# Altium PCB main_pcb_v0.PcbDoc (part 1 of 2)
Units mil, origin at the board's own origin, x right, y up, seen from the top; angles counter-clockwise.
Board outline 8090 x 4600 mil, 2 copper layers (Top Layer, Bottom Layer); 81 components, 148 nets, 565 pads, 37 vias.
Unrouted connection lines stored in the file: 2.
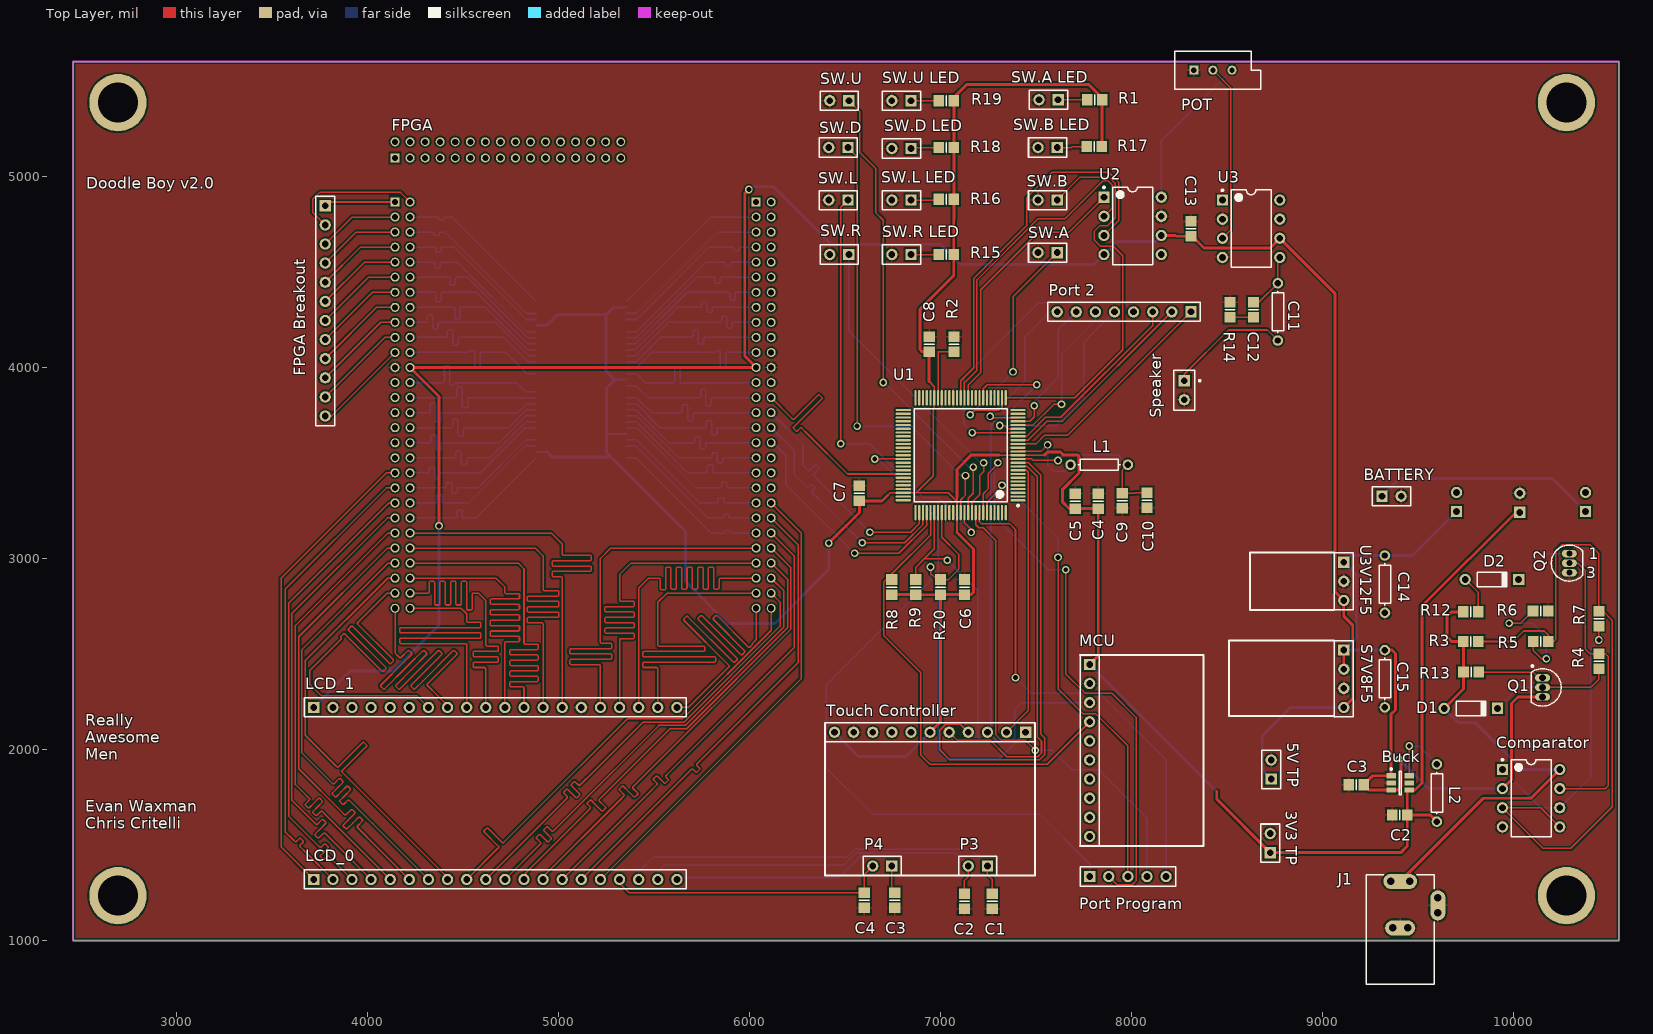
[diagram p0: Top Layer view]
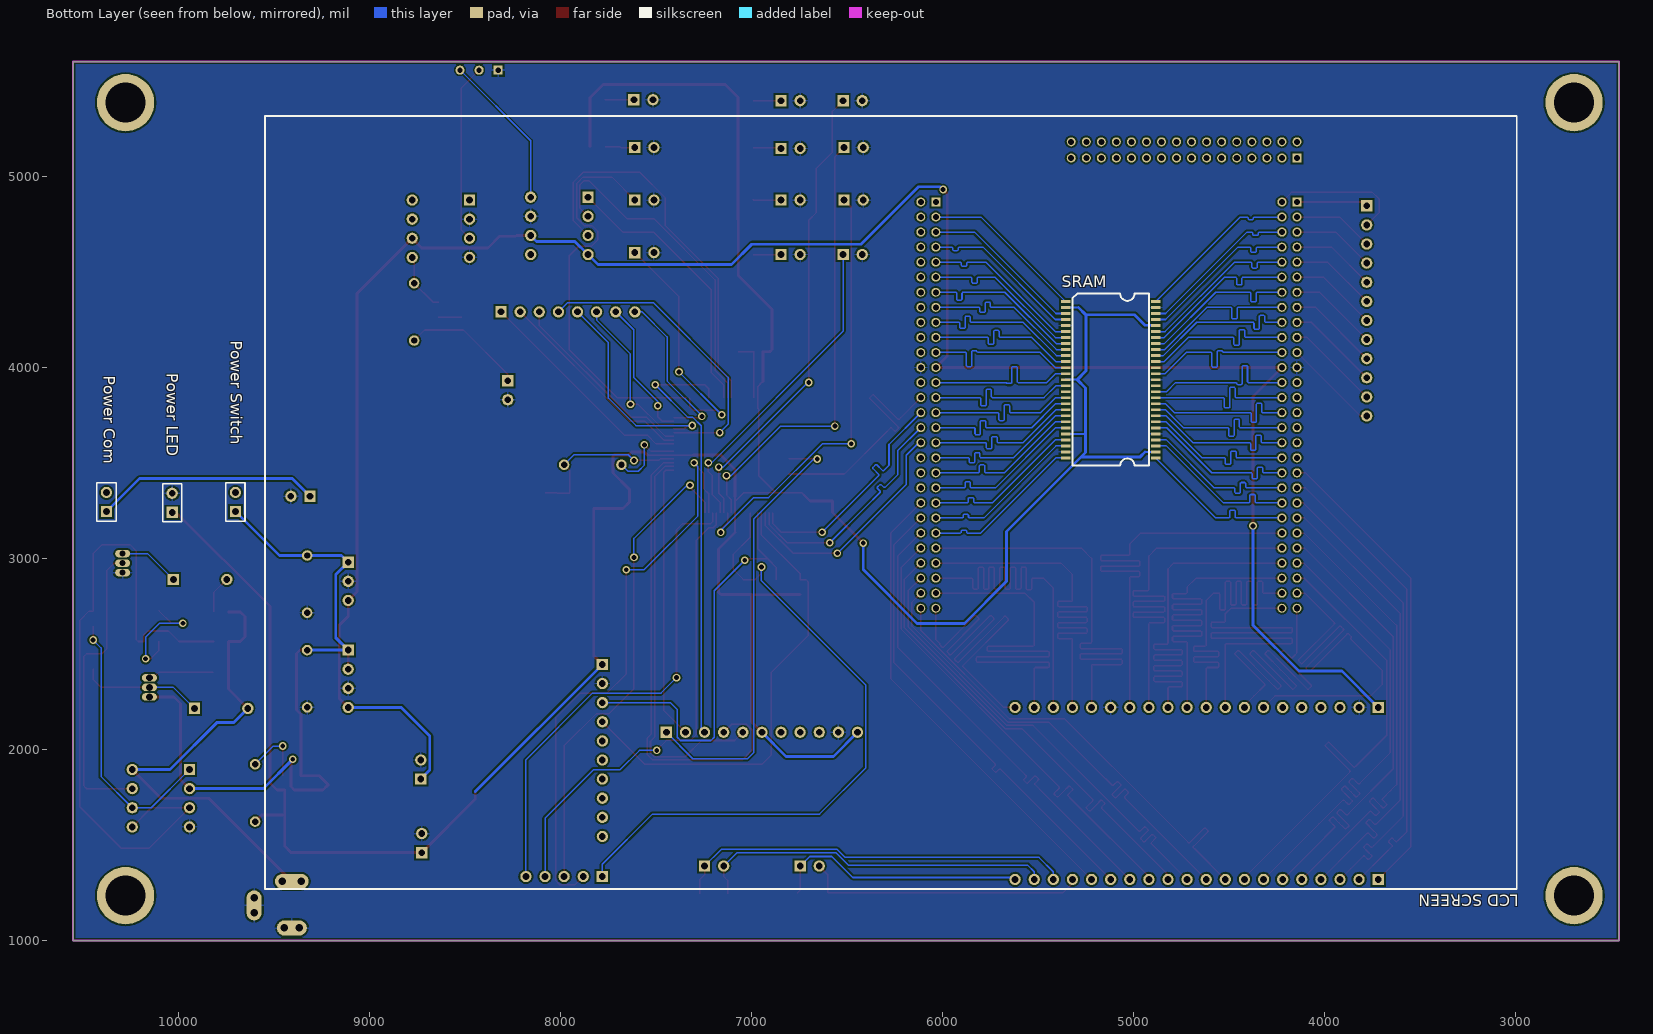
[diagram p1: Bottom Layer view, seen from below]

## Layer stack, top to bottom
Top Solder: solder mask 0.4, Solder Resist, Dk 3.5
Top Layer: signal copper 1.4
Dielectric 1: dielectric 12.6, FR-4, Dk 4.8
Bottom Layer: signal copper 1.4
Bottom Solder: solder mask 0.4, Solder Resist, Dk 3.5

## Board outline
2460,1000 10550,1000 10550,5600 2460,5600

## Design rules (kind name [scope] priority, off if disabled: settings)
Clearance [All] p1: gap=9 ignorepadtopadclearanceinfootprint=TRUE
HoleSize [All] p1: absolutevalues=TRUE maxlimit=240 minlimit=1 maxpercent=80.000 minpercent=20.000
MatchedLengths sram_match_length_2 [InNetClass('SRAM_net')] p1: tolerance=10 checknetsindiffpair=FALSE checkdiffpairvsdiffpair=TRUE checkxsignals=TRUE checkothers=TRUE
MatchedLengths lcd_match_length_1 [InNetClass('LCD_net')] p2: tolerance=10 checknetsindiffpair=FALSE checkdiffpairvsdiffpair=TRUE checkxsignals=TRUE checkothers=TRUE
MatchedLengths lcd_spi_match_length [InNetClass('FPGA_spi')] p3: tolerance=10 checknetsindiffpair=FALSE checkdiffpairvsdiffpair=TRUE checkxsignals=TRUE checkothers=TRUE
MinimumSolderMaskSliver [All] p1 off: minsoldermaskwidth=10
PolygonConnect [All] p1: connectstyle=Relief reliefconductorwidth=10 reliefentries=4 polygonreliefangle="90 Angle" airgapwidth=10
RoutingCorners [All] p1: cornerstyle=Round minsetback=1000 maxsetback=1000
RoutingVias [All] p1: holewidth=25 width=40 viastyle="Through Hole" minholewidth=25 minwidth=40 maxholewidth=25 maxwidth=40
SMDNeckDown [InNet('3V3')] p1: percent=80.000
SilkToSolderMaskClearance [IsPad] p1 off: minsilkscreentomaskgap=2.5 clearancetoexposedcopper=TRUE
SolderMaskExpansion [All] p1: expansion=4
Width 5V_width [InNet('5V')] p1: maxlimit=15 minlimit=7 preferedwidth=15
Width Power_common_width [InNet('Power_Common')] p2: maxlimit=15 minlimit=7 preferedwidth=15
Width 12V_width [InNet('12V')] p3: maxlimit=15 minlimit=7 preferedwidth=15
Width V_BAT_width [InNet('V_BAT')] p4: maxlimit=15 minlimit=7 preferedwidth=15
Width 3V3_width [InNet('3V3')] p5: maxlimit=15 minlimit=7 preferedwidth=15
Width [All] p6: maxlimit=15 minlimit=7 preferedwidth=8
26 further rules are at their usual default settings.

## Classes and differential pairs
net class FPGA_spi: FPGA_MISO FPGA_MOSI FPGA_SCLK FPGA_SS
net class LCD_net: BLUE0 BLUE1 BLUE2 BLUE3 BLUE4 BLUE5 BLUE6 BLUE7 CLK_pixel DE GREEN0 GREEN1 GREEN2 GREEN3 GREEN4 GREEN5 GREEN6 GREEN7 HSYNC ON/OFF RED0 RED1 RED2 RED3 RED4 RED5 RED6 RED7 VSYNC
net class SRAM_net: /BHE /BLE /CE /OE /WE A0 A1 A2 A3 A4 A5 A6 A7 A8 A9 A10 A11 A12 A13 A14 A15 A16 A17 A18 A19 IO0 IO1 IO2 IO3 IO4 IO5 IO6 IO7 IO8 IO9 IO10 IO11 IO12 IO13 IO14 IO15
net class auto_route_class: 3V3 5V 12V DAC_CS DAC_DIN DAC_SCK IMU_SCL IMU_SDA NetBuck_6 NetC9_2 NetC11_1 NetC11_2 NetC12_1 NetComparator_1 NetComparator_3 NetComparator_7 NetD1_2 NetD2_1 NetD2_2 "NetPort 2_1" "NetPort 2_2" "NetPort 2_3" "NetPort 2_4" "NetPort 2_5" "NetPort 2_6" "NetPort 2_7" "NetPort 2_8" NetPOT_2 NetPOT_3 NetQ1_1 NetR1_2 NetR2_1 NetR5_1 NetR15_2 NetR16_2 NetR17_2 NetR18_2 NetR19_2 Power_Common RST_NMI_N SWCLKTCK SWDIOTMS switch_A switch_B switch_DOWN switch_LEFT switch_RIGHT switch_UP TDI_ADC14CLK TDO_SWO TOUCH_INT TOUCH_SCL TOUCH_SDA/CS TOUCH_SDI TOUCH_SDO V_BAT VSW VSYNC XL XR YD YU
component class dac_audio_out: C11 C12 C13 POT R14 Speaker U2 U3
component class MSPBreakout: C4 C5 C6 C7 C8 C9 C10 L1 MCU "Port 2" "Port Program" R1 R2 R8 R9 R15 R16 R17 R18 R19 R20 SW.A "SW.A LED" SW.B "SW.B LED" SW.D "SW.D LED" SW.L "SW.L LED" SW.R "SW.R LED" SW.U "SW.U LED" U1
component class BatteryRecharge2: "3V3 TP" "5V TP" BATTERY Buck C2 C3 C14 C15 Comparator D1 D2 J1 L2 "Power Com" "Power LED" "Power Switch" Q1 Q2 R3 R4 R5 R6 R7 R12 R13 S7V8F5 U3V12F5
component class lcd_breakout: C1 C2 C3 C4 LCD_0 LCD_1 P3 P4 "Touch Controller"
component class fpga_sram: FPGA "FPGA Breakout" SRAM

## Components (designator, comment, footprint, x,y, rotation, side; value= is the part's Value field where it differs from the comment)
"3V3 TP" "Header 2" HDR1X2 8725,1460 r90 top
"5V TP" "Header 2" HDR1X2 8730,1845 r90 top
BATTERY "Header 2" HDR1X2 9310,3325 r0 top (schematic designator Battery)
Buck "Header 3X2A" SOT23-6_M 9405,1825 r0 top
C1 "Cap" 6-0805_M 7270,1205.63 r90 top value=10nF
C2 "Cap" 6-0805_M 9402.87,1657.4 r0 top value=10uF
C2 "Cap" 6-0805_M 7125,1205.63 r90 top value=10nF
C3 "Cap" 6-0805_M 9175,1815 r0 top value=4.7uF
C3 "Cap" 6-0805_M 6760,1210 r90 top value=10nF
C4 "Cap" 6-0805_M 7825,3300 r270 top value=100nF
C4 "Cap" 6-0805_M 6600,1210.63 r90 top value=10nF
C5 "Cap" 6-0805_M 7705,3300 r270 top value=100nF
C6 "Cap Pol1" 6-0805_M 7125,2850 r90 top value=10uF
C7 "Cap" 6-0805_M 6575,3340 r270 top value=100nF
C8 "Cap" 6-0805_M 6940,4120.79 r270 top value=100nF
C9 "Cap" 6-0805_M 7950,3300.63 r90 top value=100nF
C10 "Cap" 6-0805_M 8080,3304.37 r90 top value=4uF
C11 "Cap Pol1" AXIAL-0.3 8765,4290 r270 top value=270uF
C12 "Cap" 6-0805_M 8637.44,4300.63 r90 top value=0.047uF
C13 "Cap" 6-0805_M 8310,4725 r90 top value=0.1uF
C14 "Cap Pol2" AXIAL-0.3 9325,2865 r270 top value=50uF
C15 "Cap Pol2" AXIAL-0.3 9325,2370 r270 top value=50uF
Comparator "LT1017CN8" LT-N8 10090,1745 r0 top
D1 "Diode 1N914" DO-35 9775,2215 r0 top
D2 "Diode 1N914" DO-35 9885,2890 r0 top
FPGA "CoreEP3C16" CoreEP3C16 4145.24,4864.96 r0 top
"FPGA Breakout" "Header 12" HDR1X12 3780,4845 r270 top
J1 "PWR2.5" KLD-0202 9405,770.63 r90 top
L1 "Inductor" AXIAL-0.3 7830,3490 r0 top value=4.7uH
L2 "Inductor" AXIAL-0.3 9597.24,1772.4 r270 top value=10uH
LCD_0 "Header 20" HDR1X20 3720,1320 r0 top
LCD_1 "Header 20" HDR1X20 3720,2220 r0 top
MCU "Header 10" HDR1X10 7780,2445 r270 top
P3 "Header 2" HDR1X2 7245,1390 r180 top
P4 "Header 2" HDR1X2 6745,1390 r180 top
"Port 2" "Header 8" HDR1X8 8310,4290 r180 top
"Port Program" "Header 5" HDR1X5 7780,1335 r0 top
POT "RPot_3" VR5 8425,5555 r0 top value=10K
"Power Com" "Header 2" HDR1X2 10375,3245 r90 bottom
"Power LED" "Header 2" HDR1X2 10031.06,3240.63 r90 bottom
"Power Switch" "Header 2" HDR1X2 9700,3245 r90 bottom
Q1 "2N3906" TO-92A 10150,2325 r180 top
Q2 "2N7000" SOT54 10290,2975 r0 top
R1 "Res1" 6-0805_M 7805.63,5400 r180 top value=1K
R2 "Res1" 6-0805_M 7070,4120.16 r90 top value=91K
R3 "Res1" 6-0805_M 9775,2565 r180 top value=5.6K
R4 "Res1" 6-0805_M 10445,2460.63 r270 top value=510
R5 "Res1" 6-0805_M 10140,2565 r0 top value=1.5K
R6 "Res1" 6-0805_M 10139.37,2725 r180 top value=1K
R7 "Res1" 6-0805_M 10445,2685 r270 top value=100K
R8 "Res1" 6-0805_M 6745,2850 r270 top value=10K
R9 "Res1" 6-0805_M 6870,2850 r270 top value=10K
R12 "Res1" 6-0805_M 9775,2720 r0 top value=1K
R13 "Res1" 6-0805_M 9775.63,2405 r180 top value=39
R14 "Res1" 6-0805_M 8515,4300 r270 top value=10
R15 "Res1" 6-0805_M 7029.37,4590 r180 top value=1K
R16 "Res1" 6-0805_M 7030,4878.82 r180 top value=1K
R17 "Res1" 6-0805_M 7804.37,5155 r180 top value=1K
R18 "Res1" 6-0805_M 7030.63,5150 r180 top value=1K
R19 "Res1" 6-0805_M 7030.63,5395 r180 top value=1K
R20 "Res1" 6-0805_M 7000,2850 r270 top value=47K
S7V8F5 "Header 4" HDR1X4 9110,2520 r270 top
Speaker "Speaker" PIN2 8275,3930 r270 top
SRAM "CY7C10612G30" TSOP54 5120,3935 r270 bottom
SW.A "Header 2" HDR1X2 7610,4600 r180 top
"SW.A LED" "Header 2" HDR1X2 7615,5400 r180 top
SW.B "Header 2" HDR1X2 7610,4875 r180 top
"SW.B LED" "Header 2" HDR1X2 7610,5150 r180 top
SW.D "Header 2" HDR1X2 6515,5150 r180 top
"SW.D LED" "Header 2" HDR1X2 6845,5145 r180 top
SW.L "Header 2" HDR1X2 6515,4875 r180 top
"SW.L LED" "Header 2" HDR1X2 6845,4875 r180 top
SW.R "Header 2" HDR1X2 6520,4590 r180 top
"SW.R LED" "Header 2" HDR1X2 6845,4590 r180 top
SW.U "Header 2" HDR1X2 6520,5395 r180 top
"SW.U LED" "Header 2" HDR1X2 6845,5395 r180 top
"Touch Controller" "Header 11" HDR1X11 7445,2090 r180 top
U1 "XMS432P401RIPZR" PZ0100A_M 7105,3540 r180 top value=Value
U2 "LT1661" DIP-8 8005,4740 r0 top
U3 "LM386N-1" DIP-8 8625,4725 r0 top
U3V12F5 "Header 3" HDR1X3 9110,2980 r270 top

## Footprints (in the part's own frame and the unit in brackets; to place one, negate y for a bottom-side part, rotate by r counter-clockwise, add the part's x,y. Pads: shape width x height; smd on the part's side, far side on the other; paste and mask are expansions set on the pad)
6-0805_M [mm] "Chip Resistor, Body 2.0x1.2mm, IPC Low Density"
  rect 1.4x1.5 smd: 1(-1,0) 2(1,0)
  silkscreen extent 0,-0.65 0,0.65, body extent -1.07,-0.7 1.07,0.7, height 0.7
AXIAL-0.3 [mm] "Axial Device, Thru-Hole; 2 Leads; 0.3 in Pin Spacing"
  round 1.4 hole 0.85: 1(-3.81,0) 2(3.81,0)
  silkscreen extent -2.77,-0.76 2.77,0.76
CoreEP3C16 [mm]
  rect 1.2x1.2 hole 0.8: 1(0,0) 57(0,5.842) 89(48,0)
  round 1.2 hole 0.8: 2(2,0) 3(0,-2) 4(2,-2) 5(0,-4) 6(2,-4) 7(0,-6) 8(2,-6) 9(0,-8) 10(2,-8) 11(0,-10) 12(2,-10) 13(0,-12) 14(2,-12) 15(0,-14) 16(2,-14) 17(0,-16) 18(2,-16) 19(0,-18) 20(2,-18) 21(0,-20) 22(2,-20) 23(0,-22) 24(2,-22) 25(0,-24) 26(2,-24) 27(0,-26) 28(2,-26) 29(0,-28) 30(2,-28) 31(0,-30) 32(2,-30) 33(0,-32) 34(2,-32) 35(0,-34) 36(2,-34) 37(0,-36) 38(2,-36) 39(0,-38) 40(2,-38) 41(0,-40) 42(2,-40) 43(0,-42) 44(2,-42) 45(0,-44) 46(2,-44) 47(0,-46) 48(2,-46) 49(0,-48) 50(2,-48) 51(0,-50) 52(2,-50) 53(0,-52) 54(2,-52) 55(0,-54) 56(2,-54) 58(0,8) 59(2,5.842) 60(2,8) 61(4,5.842) 62(4,8) 63(6,5.842) 64(6,8) 65(8,5.842) 66(8,8) 67(10,5.842) 68(10,8) 69(12,5.842) 70(12,8) 71(14,5.842) 72(14,8) 73(16,5.842) 74(16,8) 75(18,5.842) 76(18,8) 77(20,5.842) 78(20,8) 79(22,5.842) 80(22,8) 81(24,5.842) 82(24,8) 83(26,5.842) 84(26,8) 85(28,5.842) 86(28,8) 87(30,5.842) 88(30,8) 90(50,0) 91(48,-2) 92(50,-2) 93(48,-4) 94(50,-4) 95(48,-6) 96(50,-6) 97(48,-8) 98(50,-8) 99(48,-10) 100(50,-10) 101(48,-12) 102(50,-12) 103(48,-14) 104(50,-14) 105(48,-16) 106(50,-16) 107(48,-18) 108(50,-18) 109(48,-20) 110(50,-20) 111(48,-22) 112(50,-22) 113(48,-24) 114(50,-24) 115(48,-26) 116(50,-26) 117(48,-28) 118(50,-28) 119(48,-30) 120(50,-30) 121(48,-32) 122(50,-32) 123(48,-34) 124(50,-34) 125(48,-36) 126(50,-36) 127(48,-38) 128(50,-38) 129(48,-40) 130(50,-40) 131(48,-42) 132(50,-42) 133(48,-44) 134(50,-44) 135(48,-46) 136(50,-46) 137(48,-48) 138(50,-48) 139(48,-50) 140(50,-50) 141(48,-52) 142(50,-52) 143(48,-54) 144(50,-54)
DIP-8 [mm] "DIP; 8 Leads; Row Spacing 7.62 mm; Pitch 2.54 mm"
  rect 1.5x1.5 hole 0.9: 1(-3.81,3.81)
  round 1.5 hole 0.9: 2(-3.81,1.27) 3(-3.81,-1.27) 4(-3.81,-3.81) 5(3.81,-3.81) 6(3.81,-1.27) 7(3.81,1.27) 8(3.81,3.81)
  silkscreen extent -3.93,-5.15 2.65,5.23, body extent -3.6,-5.15 3.6,5.15, height 5.08
DO-35 [mm] "Diode, Axial; Body 3.8 x 1.9 mm (LxDia. max), Lead Dia. 0.53 mm (max)"
  round 1.5 hole 0.9: 1(-3.55,0)
  rect 1.5x1.5 hole 0.9: 2(3.55,0)
  silkscreen extent -1.95,-0.95 2.05,0.95
HDR1X2 [mm] "Connector; Header; 2 Position"
  rect 1.5x1.5 hole 0.9: 1(0,0)
  round 1.5 hole 0.9: 2(2.54,0)
  silkscreen extent -1.27,-1.27 3.81,1.27
HDR1X3 [mm] "Connector; Header; 3 Position"
  rect 1.5x1.5 hole 0.9: 1(0,0)
  round 1.5 hole 0.9: 2(2.54,0) 3(5.08,0)
  silkscreen extent -1.27,-1.27 6.35,1.27
HDR1X4 [mm] "Connector; Header; 4 Position"
  rect 1.5x1.5 hole 0.9: 1(0,0)
  round 1.5 hole 0.9: 2(2.54,0) 3(5.08,0) 4(7.62,0)
  silkscreen extent -1.27,-1.27 8.89,1.27
HDR1X5 [mm] "Connector; Header; 5 Position"
  rect 1.5x1.5 hole 0.9: 1(0,0)
  round 1.5 hole 0.9: 2(2.54,0) 3(5.08,0) 4(7.62,0) 5(10.16,0)
  silkscreen extent -1.27,-1.27 11.43,1.27
HDR1X8 [mm] "Connector; Header; 8 Position"
  rect 1.5x1.5 hole 0.9: 1(0,0)
  round 1.5 hole 0.9: 2(2.54,0) 3(5.08,0) 4(7.62,0) 5(10.16,0) 6(12.7,0) 7(15.24,0) 8(17.78,0)
  silkscreen extent -1.27,-1.27 19.05,1.27
HDR1X10 [mm] "Connector; Header; 10 Position"
  rect 1.5x1.5 hole 0.9: 1(0,0)
  round 1.5 hole 0.9: 2(2.54,0) 3(5.08,0) 4(7.62,0) 5(10.16,0) 6(12.7,0) 7(15.24,0) 8(17.78,0) 9(20.32,0) 10(22.86,0)
  silkscreen extent -1.27,-1.27 24.13,1.27
HDR1X11 [mm] "Connector; Header; 11 Position"
  rect 1.5x1.5 hole 0.9: 1(0,0)
  round 1.5 hole 0.9: 2(2.54,0) 3(5.08,0) 4(7.62,0) 5(10.16,0) 6(12.7,0) 7(15.24,0) 8(17.78,0) 9(20.32,0) 10(22.86,0) 11(25.4,0)
  silkscreen extent -1.27,-1.27 26.67,1.27
HDR1X12 [mm] "Connector; Header; 12 Position"
  rect 1.5x1.5 hole 0.9: 1(0,0)
  round 1.5 hole 0.9: 2(2.54,0) 3(5.08,0) 4(7.62,0) 5(10.16,0) 6(12.7,0) 7(15.24,0) 8(17.78,0) 9(20.32,0) 10(22.86,0) 11(25.4,0) 12(27.94,0)
  silkscreen extent -1.27,-1.27 29.21,1.27
HDR1X20 [mm] "Connector; Header; 20 Position"
  rect 1.5x1.5 hole 0.9: 1(0,0)
  round 1.5 hole 0.9: 2(2.54,0) 3(5.08,0) 4(7.62,0) 5(10.16,0) 6(12.7,0) 7(15.24,0) 8(17.78,0) 9(20.32,0) 10(22.86,0) 11(25.4,0) 12(27.94,0) 13(30.48,0) 14(33.02,0) 15(35.56,0) 16(38.1,0) 17(40.64,0) 18(43.18,0) 19(45.72,0) 20(48.26,0)
  silkscreen extent -1.27,-1.27 49.53,1.27
KLD-0202 [mm] "DC Power Jack, 2.5mm, KLD Series, PCB Mount"
  oval 2x4.5 all layers, no hole: 1(13.7,0)
  round 1.5 hole 1: 1A(13.7,-1.25) 1B(13.7,1.25) 2A(7.5,-1) 2B(7.5,1) 3A(9.5,-5) 3B(11.5,-5)
  oval 2x4 all layers, no hole: 2(7.5,0)
  oval 4x2 all layers, no hole: 3(10.5,-5)
  silkscreen extent 0,-4.5 14.6,4.5
LT-N8 [mm] "DIP, 8-Leads, Body 10.16x6.477mm, Pitch 2.54mm"
  rect 1.5x1.5 hole 0.9: 1(-3.81,3.81)
  round 1.5 hole 0.9: 2(-3.81,1.27) 3(-3.81,-1.27) 4(-3.81,-3.81) 5(3.81,-3.81) 6(3.81,-1.27) 7(3.81,1.27) 8(3.81,3.81)
  silkscreen extent -3.93,-5.1 2.65,5.23, body extent -3.95,-5.07 3.95,5.07, height 3.94
PIN2 [mm] "Photosensitive Diode; 2 Leads"
  rect 1.5x1.5 hole 0.9: 1(0,0)
  round 1.5 hole 0.9: 2(2.54,0)
  silkscreen extent -1.4,-1.4 3.94,2.18
PZ0100A_M [mm]
  oval 2.05x0.3 smd paste+0 mask+0.051: 1(-7.625,6) 2(-7.625,5.5) 3(-7.625,5) 4(-7.625,4.5) 5(-7.625,4) 6(-7.625,3.5) 7(-7.625,3) 8(-7.625,2.5) 9(-7.625,2) 10(-7.625,1.5) 11(-7.625,1) 12(-7.625,0.5) 13(-7.625,0) 14(-7.625,-0.5) 15(-7.625,-1) 16(-7.625,-1.5) 17(-7.625,-2) 18(-7.625,-2.5) 19(-7.625,-3) 20(-7.625,-3.5) 21(-7.625,-4) 22(-7.625,-4.5) 23(-7.625,-5) 24(-7.625,-5.5) 25(-7.625,-6) 51(7.625,-6) 52(7.625,-5.5) 53(7.625,-5) 54(7.625,-4.5) 55(7.625,-4) 56(7.625,-3.5) 57(7.625,-3) 58(7.625,-2.5) 59(7.625,-2) 60(7.625,-1.5) 61(7.625,-1) 62(7.625,-0.5) 63(7.625,0) 64(7.625,0.5) 65(7.625,1) 66(7.625,1.5) 67(7.625,2) 68(7.625,2.5) 69(7.625,3) 70(7.625,3.5) 71(7.625,4) 72(7.625,4.5) 73(7.625,5) 74(7.625,5.5) 75(7.625,6)
  oval 0.3x2.05 smd paste+0 mask+0.051: 26(-6,-7.625) 27(-5.5,-7.625) 28(-5,-7.625) 29(-4.5,-7.625) 30(-4,-7.625) 31(-3.5,-7.625) 32(-3,-7.625) 33(-2.5,-7.625) 34(-2,-7.625) 35(-1.5,-7.625) 36(-1,-7.625) 37(-0.5,-7.625) 38(0,-7.625) 39(0.5,-7.625) 40(1,-7.625) 41(1.5,-7.625) 42(2,-7.625) 43(2.5,-7.625) 44(3,-7.625) 45(3.5,-7.625) 46(4,-7.625) 47(4.5,-7.625) 48(5,-7.625) 49(5.5,-7.625) 50(6,-7.625) 76(6,7.625) 77(5.5,7.625) 78(5,7.625) 79(4.5,7.625) 80(4,7.625) 81(3.5,7.625) 82(3,7.625) 83(2.5,7.625) 84(2,7.625) 85(1.5,7.625) 86(1,7.625) 87(0.5,7.625) 88(0,7.625) 89(-0.5,7.625) 90(-1,7.625) 91(-1.5,7.625) 92(-2,7.625) 93(-2.5,7.625) 94(-3,7.625) 95(-3.5,7.625) 96(-4,7.625) 97(-4.5,7.625) 98(-5,7.625) 99(-5.5,7.625) 100(-6,7.625)
  silkscreen extent -7.75,-6.2 6.2,6.82, body extent 0,0 0.25,0.25, height 0.25
SOT23-6_M [mm] "SOT23, 6-Leads, Body 2.9x1.6mm, Pitch 0.95mm, Lead Span 2.7mm, IPC Low Density"
  rect 1.3x0.7 smd: 1(-1.2,0.95) 2(-1.2,0) 3(-1.2,-0.95) 4(1.2,-0.95) 5(1.2,0) 6(1.2,0.95)
  silkscreen extent -1.32,-1.55 0.15,1.97, body extent -0.9,-1.55 0.9,1.55, height 1.45
SOT54 [mm] "TO, Flat Index; 3 In-Line, Axial Leads; Body Dia. 4.6mm; Leads 0.48 x 0.45 mm (max)"
  oval 2x1 hole 0.8: 1(0,1.27) 2(0,0) 3(0,-1.27)
  silkscreen extent -2.4,-2.4 1.8,2.4
TO-92A [mm] "TO, Flat Index; 3 In-Line, Axial Leads; Body Dia. 4.5mm; Leads 0.51 x 0.48 mm (max)"
  oval 2x1 hole 0.9: 1(0,-1.27) 2(0,0) 3(0,1.27)
  silkscreen extent -2.48,-2.95 1.5,2.48, body extent -2.48,-2.5 1.5,2.5, height 6.86
TSOP54 [mm]
  rect 0.375x1.27 smd: 1(-10.4,-6) 2(-9.6,-6) 3(-8.8,-6) 4(-8,-6) 5(-7.2,-6) 6(-6.4,-6) 7(-5.6,-6) 8(-4.8,-6) 9(-4,-6) 10(-3.2,-6) 11(-2.4,-6) 12(-1.6,-6) 13(-0.8,-6) 14(0,-6) 15(0.8,-6) 16(1.6,-6) 17(2.4,-6) 18(3.2,-6) 19(4,-6) 20(4.8,-6) 21(5.6,-6) 22(6.4,-6) 23(7.2,-6) 24(8,-6) 25(8.8,-6) 26(9.6,-6) 27(10.4,-6) 28(10.4,6) 29(9.6,6) 30(8.8,6) 31(8,6) 32(7.2,6) 33(6.4,6) 34(5.6,6) 35(4.8,6) 36(4,6) 37(3.2,6) 38(2.4,6) 39(1.6,6) 40(0.8,6) 41(0,6) 42(-0.8,6) 43(-1.6,6) 44(-2.4,6) 45(-3.2,6) 46(-4,6) 47(-4.8,6) 48(-5.6,6) 49(-6.4,6) 50(-7.2,6) 51(-8,6) 52(-8.8,6) 53(-9.6,6) 54(-10.4,6)
  silkscreen extent -11.43,-5.08 11.43,5.08
VR5 [mm] "Thru-Hole; 3 Leads"
  rect 1.2x1.2 hole 0.7: 1(-2.54,0)
  round 1.2 hole 0.7: 2(0,0) 3(2.54,0)
  silkscreen extent -5.08,-2.54 6.35,2.54

## Part data
"3V3 TP" "5V TP" BATTERY P3 P4 "Power Com" "Power LED" "Power Switch" SW.A "SW.A LED" SW.B "SW.B LED" SW.D "SW.D LED" SW.L "SW.L LED" SW.R "SW.R LED" SW.U "SW.U LED": "Header, 2-Pin", LatestRevisionDate=17-Jul-2002, LatestRevisionNote="Re-released for DXP Platform.", Publisher="Altium Limited"
Buck: "Header, 3-Pin, Dual row", LatestRevisionDate=17-Jul-2002, LatestRevisionNote="Re-released for DXP Platform.", Publisher="Altium Limited"
C1 C2 C2 C3 C3 C4 C4 C5 C7 C8 C9 C10 C12 C13: "Capacitor", LatestRevisionDate=17-Jul-2002, LatestRevisionNote="Re-released for DXP Platform.", PackageDescription="Radial Cap, Thru-Hole; 2 Leads; 0.3 in Pin Spacing", PackageReference=RAD-0.3, Published=8-Jun-2000, Publisher="Altium Limited"
C6 C11: "Polarized Capacitor (Radial)", LatestRevisionDate=17-Jul-2002, LatestRevisionNote="Re-released for DXP Platform.", PackageDescription="Polarized Capacitor (Radial); 2 Leads", PackageReference=RB7.6-15, Published=8-Jun-2000, Publisher="Altium Limited"
C14 C15: "Polarized Capacitor (Axial)", LatestRevisionDate=17-Jul-2002, LatestRevisionNote="Re-released for DXP Platform.", PackageDescription="Polarized Capacitor; 2 Leads", PackageReference=POLAR0.8, Published=8-Jun-2000, Publisher="Altium Limited"
Comparator: "Micropower Comparator, 2 Channels, 1.2 to 40 V, 0 to +70 degC, 8-pin PDIP (N8)", Generic Part Number=LT1017, Manufacturer="Linear Technology", Supplier Part Number 1=LT1017CN8-ND, Supply Current (uA) Guaranteed=60, Supply Current (uA) Typical=30, Supply Voltage Range="1.2 to 40 V", Channels (#)=2, ComponentLink1Description="Manufacturer URL", ComponentLink1URL=http://www.linear.com/, ComponentLink2Description=Datasheet, ComponentLink2URL=http://cds.linear.com/docs/en/datasheet/10178ff.pdf, ComponentLink3Description="Package Specification", ComponentLink3URL=http://cds.linear.com/docs/en/packaging/05081510_I_N8.pdf, DatasheetVersion="Rev F", Features=Comparator, Mounting Technology="Through Hole", PackageDescription="8-Pin PDIP, Row Spacing 7.62, Pitch 2.54 mm", PackageReference=N8, PartNumber=LT1017CN8, Prop Delay (us)=22, RoHS=N, Supplier 1=Digi-Key, Supplier 2=Newark, Supplier Part Number 2=57M0864, Vos (mV) Guaranteed=1, Vos (mV) Typical=0.4, Vs Max (V)=40, Vs Min (V)=1.2
D1 D2: "High Conductance Fast Diode", Code_JEDEC=DO-204-AH, ComponentLink1Description="Manufacturer Link", ComponentLink1URL=http://www.fairchildsemi.com/, ComponentLink2Description=Datasheet, ComponentLink2URL=http://www.fairchildsemi.com/ds/1N%2F1N4448.pdf, DatasheetVersion=1997, LatestRevisionDate=17-Jul-2002, LatestRevisionNote="Re-released for DXP Platform.", PackageDescription="Diode, Axial; Body 3.8 x 1.9 mm (LxDia. max), Lead Dia. 0.53 mm (max)", PackageReference=DO-35, Published=8-Jun-2000, Publisher="Altium Limited"
"FPGA Breakout": "Header, 12-Pin", LatestRevisionDate=17-Jul-2002, LatestRevisionNote="Re-released for DXP Platform.", Publisher="Altium Limited"
J1: "Low Voltage Power Supply Connector", ComponentLink1Description="Manufacturer Link", ComponentLink1URL=http://domino.kycon.com/internet/Products.html, DatasheetDocument=09-May-2002, Published=17-Dec-2003, Publisher="Altium Limited"
LCD_0 LCD_1: "Header, 20-Pin", LatestRevisionDate=17-Jul-2002, LatestRevisionNote="Re-released for DXP Platform.", Publisher="Altium Limited"
MCU: "Header, 10-Pin", LatestRevisionDate=17-Jul-2002, LatestRevisionNote="Re-released for DXP Platform.", Publisher="Altium Limited"
"Port 2": "Header, 8-Pin", LatestRevisionDate=17-Jul-2002, LatestRevisionNote="Re-released for DXP Platform.", Publisher="Altium Limited"
"Port Program": "Header, 5-Pin", LatestRevisionDate=17-Jul-2002, LatestRevisionNote="Re-released for DXP Platform.", Publisher="Altium Limited"
POT: library part RPot, "Potentiometer", LatestRevisionDate=17-Jul-2002, LatestRevisionNote="Re-released for DXP Platform.", Published=8-Jun-2000, Publisher="Altium Limited", Set Position=0.5, Sim Note="Enter the Resistance value and the set point into parameter fields."
Q1: "PNP General Purpose Amplifier", ComponentLink1Description="Manufacturer Link", ComponentLink1URL=http://www.fairchildsemi.com/, ComponentLink2Description=Datasheet, ComponentLink2URL=http://www.fairchildsemi.com/ds/2N%2F2N3906.pdf, DatasheetVersion=1997, LatestRevisionDate=15-Jan-2003, LatestRevisionNote="PCB Footprint 'BCY-W3/D4.7' replaced", PackageDescription="TO, Flat Index; 3 In-Line, Axial Leads; Body Dia. 4.5mm; Leads 0.51 x 0.48 mm (max)", PackageReference=TO-92A, PackageVersion=Sep-1998, Published=8-Jun-2000, Publisher="Altium Limited"
Q2: "N-channel Enhancement Mode Field-effect Transistor", Code_JEDEC=TO-92, Code_JEITA=SC-43, ComponentLink1Description="Manufacturer Link", ComponentLink1URL=http://www.semiconductors.philips.com/, ComponentLink2Description=Datasheet, ComponentLink2URL=http://www.semiconductors.philips.com/acrobat/datasheets/2N7000-03.pdf, DatasheetVersion=19-May-2000, LatestRevisionDate=12-Dec-2006, LatestRevisionNote="Footprint pad sequence fixed.", PackageDescription="Plastic Single-Ended Leaded (through hole) package; 3 Leads (TO-92)", PackageReference=SOT54, PackageVersion=Feb-1997, Published=17-Sep-2003, Publisher="Altium Limited"
R1 R2 R3 R4 R5 R6 R7 R8 R9 R12 R13 R14 R15 R16 R17 R18 R19 R20: "Resistor", LatestRevisionDate=17-Jul-2002, LatestRevisionNote="Re-released for DXP Platform.", PackageDescription="Axial Device, Thru-Hole; 2 Leads; 0.3 in Pin Spacing", PackageReference=AXIAL-0.3, Published=8-Jun-2000, Publisher="Altium Limited"
S7V8F5: "Header, 4-Pin", LatestRevisionDate=17-Jul-2002, LatestRevisionNote="Re-released for DXP Platform.", Publisher="Altium Limited"
Speaker: "Loudspeaker", LatestRevisionDate=17-Jul-2002, LatestRevisionNote="Re-released for DXP Platform.", PackageReference=PIN2, Published=24-Mar-1999, Publisher="Altium Limited"
"Touch Controller": "Header, 11-Pin", LatestRevisionDate=17-Jul-2002, LatestRevisionNote="Re-released for DXP Platform.", Publisher="Altium Limited"
U1: "Imported", Manufacturer="Texas Instruments", CompType=IC, MountType=SMT, PackageReference=PZ0100A, PartNumber=XMS432P401RIPZR, PIN_COUNT=100, RefDes=RefDes, TYPE=TYPE
U3: "Low-Voltage Audio Power Amplifier", PackageDocument=Sep-1997, DatasheetDocument=Sep-1997, PackageReference=N08E, Published=15-Apr-2002, Publisher="Altium Limited"
U3V12F5: "Header, 3-Pin", LatestRevisionDate=17-Jul-2002, LatestRevisionNote="Re-released for DXP Platform.", Publisher="Altium Limited"
L1 L2: Code_IEC=1005, Code_JEITA=0402, LatestRevisionDate=29-May-2009, LatestRevisionNote="IPC-7351 Footprint Added.", PackageDescription="Chip Inductor", PackageReference=0402-A, Published=8-Jun-2000, Publisher="Altium Limited"

## Free pads (board coordinates)
  round 300 hole 209: 1(10275,5385) 2(10275,1235) 3(2695,1235) 4(2695,5385)

## Via types
v1: diameter 40, hole 25, Top Layer to Bottom Layer, 37 vias

## Nets (pads, with @x,y where several pads share a name; then routed paths per layer and width w, separated by ;. In a path a pad name is that pad's centre, name@x,y a point inside that pad or via, vN(x,y) a via of type N, cw(c..) or ccw(c..) an arc to the next point about the centre after c; other vN are vias at no path point)
3V3: "3V3 TP.1" "Power LED.1" "Touch Controller.6" "Touch Controller.11" Buck.4 C2.2@9442.24,1657.4 C4.2@7825,3260.63 C5.2 C6.1 C7.2 C8.2 L2.2 MCU.1 R1.1 R8.2 R9.2 R15.1 R16.1 R17.1 R18.1 R19.1 R20.2 SRAM.2 SRAM.14 SRAM.23 SRAM.29 SRAM.50 U1.13 U1.45 U1.73 U1.87 | length 16938.2
  Top Layer w9.45: 6722,3329 6736.15,3343.15 U1.73@6804.8,3343.15 6872.15,3343.15 ; 6940,3926 6967.2,3898.8 U1.45@6967.2,3840.2 6967.2,3786 6962,3780.8 6962,3433 6872.15,3343.15 ; 7085.31,3136.08 U1.87@7085.31,3239.8 7085.31,3298.69 ; 7085.31,3321.31 7085.31,3298.69 ; 7304,3540 U1.13@7405.2,3540 7542.86,3540 ; 6872.15,3343.15 7040.85,3343.15 7085.31,3298.69
  Top Layer w15: v1(6415,3080) 6575,3240 C7.2@6575,3300.63 6693.63,3300.63 6722,3329 ; R8.2@6745,2810.63 R9.2@6870,2810.63 6870,2810 R20.2@7000,2810 ; 6940,3926 C8.2@6940,4081.42 6904,4081.42 6893,4092.42 6893,4304 7068.74,4479.74 R15.1@7068.74,4590 7068.74,4773 7069.37,4773.63 R16.1@7069.37,4878.82 7069.37,4948 7070,4948.63 R18.1@7070,5150 R19.1@7070,5395 7070,5413 7137,5480 7775,5480 7843.74,5411.26 R17.1@7843.74,5157 ; 6945,2090 7000,2145 R20.2@7000,2810 ; 7085.31,3136.08 7172,3049.4 7172,2822.63 7160,2810.63 C6.1@7125,2810.63 R20.2@7000,2810.63 R20.2@7000,2810 ; 7085.31,3321.31 7085.31,3465.63 7159.68,3540 7304,3540 ; 7542.86,3540 7560.02,3557.16 7627.47,3557.16 7644.63,3540 7718.12,3540 7724.06,3534.06 7724.06,3445.94 7637,3358.88 7637,3296 7672.37,3260.63 C5.2@7705,3260.63 C4.2@7825,3260.63 7825,2490 MCU.1@7780,2445 ; R17.1@7843.74,5155 R17.1@7843.74,5157 ; R1.1@7845,5400 7845,5157 R17.1@7843.74,5157 ; 8445,1780 8445,1740 8725,1460 9408,1460 9442.24,1494.24 C2.2@9442.24,1657.4 ; L2.2@9597.24,1622.4 9562.24,1657.4 C2.2@9442.24,1657.4 ; 10031.06,3240.63 10010.63,3240.63 9520,2750 9520,1825 9482.6,1787.6 Buck.4@9452.24,1787.6 9442.24,1787.6 C2.2@9442.24,1657.4
  Bottom Layer w11: SRAM.29@4883.78,3557.05 4940,3557.05 ; SRAM.50@4883.78,4218.46 4885.32,4220 4940,4220 ; 5251.54,3651.54 SRAM.23@5356.22,3651.54 ; 5287.95,4312.95 SRAM.2@5356.22,4312.95 ; 5295,3935 SRAM.14@5356.22,3935
  Bottom Layer w15: 4940,3557.05 4965,3532.05 4965,3530 5275,3530 ; 4940,4220 4995,4275 5250,4275 ; 5287.95,4312.95 5250,4275 ; v1(6415,3080) 6415,2941.46 6133.54,2660 5885,2660 5665,2880 5665,3140 5275,3530 ; 6445,2090 6571,1964 6819,1964 6945,2090 ; MCU.1@7780,2445 8445,1780 ; 5250,4275 5250,3980 5295,3935 5251.54,3891.54 5251.54,3651.54 5251.54,3553.46 5275,3530
5V: "5V TP.1" C13.1 FPGA.24 FPGA.111 LCD_1.1 S7V8F5.4 U2.4 U2.6 U3.6 U3V12F5.3 | length 11451.8
  Top Layer w15: v1(4375,3170) 4375,3847.8 FPGA.24@4223.98,3998.82 FPGA.111@6035,3998.82 5975,4058.82 5975,4908 v1(5997,4930) ; U2.6@8155,4690 8230,4690 8234.37,4685.63 C13.1@8310,4685.63 8318.37,4685.63 8379,4625 8725,4625 U3.6@8775,4675 9063,4387 9063,2827 U3V12F5.3@9110,2780 9110,2697 9157,2650 9157,2267 S7V8F5.4@9110,2220
  Bottom Layer w15: LCD_1.1@3720,2220 3910,2410 4135,2410 4375,2650 v1(4375,3170) ; v1(5997,4930) 6012,4945 6124.96,4945 6425.96,4644 6998,4644 7105,4537 7802,4537 U2.4@7855,4590 7924,4659 8124,4659 U2.6@8155,4690 ; 8730,1845 8683,1892 8683,2071 8832,2220 S7V8F5.4@9110,2220
12V: Comparator.8 D1.1 J1.1 J1.1A J1.1B R3.2 R12.1 R13.2 | length 2602.3
  Top Layer w15: J1.1B@9355.79,1310 J1.1@9405,1310 ; J1.1A@9454.21,1310 J1.1@9405,1310 ; D1.1@9635.24,2215 9736.26,2316.02 R13.2@9736.26,2405 9736.26,2446 9735.63,2446.63 R3.2@9735.63,2565 9675,2565 9650,2590 9650,2695.31 9674.69,2720 R12.1@9735.63,2720 ; Comparator.8@10240,1895 10090,1745 9840,1745 J1.1@9405,1310
  Bottom Layer w15: D1.1@9635.24,2215 9708.24,2142 9795,2142 10042,1895 Comparator.8@10240,1895
/BHE: FPGA.109 SRAM.12 | length 861.8
  Bottom Layer w8: SRAM.12@5356.22,3997.99 5409.13,3997.99 5488.7,4077.56 5805,4077.56 5814.8,4077.56 5819,4081.76 5823.2,4085.96 5842.8,4085.96 5847,4081.76 5847,4077.56 5847,4007.76 5851.2,4003.56 5870.8,4003.56 5875,4007.76 5875,4073.36 5879.2,4077.56 5895,4077.56 FPGA.109@6035,4077.56
/BLE: FPGA.26 SRAM.39 | length 862.2
  Bottom Layer w8: FPGA.26@4223.98,3920.08 4390,3920.08 4399.8,3920.08 4404,3924.28 4404,4004.15 4408.2,4008.35 4427.8,4008.35 4432,4004.15 4432,3920.08 4432,3913.92 4436.2,3909.72 4455.8,3909.72 4460,3913.92 4460,3915.88 4464.2,3920.08 4590,3920.08 4780.47,3920.08 4828.54,3872.01 SRAM.39@4883.78,3872.01
/CE: FPGA.113 SRAM.13 | length 866.3
  Bottom Layer w8: SRAM.13@5356.22,3966.5 5408.5,3966.5 5454.92,3920.08 5595,3920.08 5604.8,3920.08 5609,3924.28 5609,3999.46 5613.2,4003.66 5632.8,4003.66 5637,3999.46 5637,3920.08 5637,3919.44 5641.2,3915.24 5660.8,3915.24 5665,3919.44 ; 5665,3915.88 5669.2,3920.08 5745,3920.08 FPGA.113@6035,3920.08 ; 5665,3916.31 5665,3919.02
/OE: FPGA.22 SRAM.42 | length 861.8
  Bottom Layer w8: FPGA.22@4223.98,4077.56 4520,4077.56 4529.8,4077.56 4534,4081.76 4538.2,4085.96 4557.8,4085.96 4562,4081.76 4562,4077.56 4562,4004.8 4566.2,4000.6 4585.8,4000.6 4590,4004.8 4590,4073.36 4594.2,4077.56 4670,4077.56 4723.98,4077.56 4835.04,3966.5 SRAM.42@4883.78,3966.5
/WE: FPGA.115 SRAM.15 | length 861.8
  Bottom Layer w8: SRAM.15@5356.22,3903.5 5406.46,3903.5 5468.62,3841.34 5730,3841.34 5739.8,3841.34 5744,3845.54 5744,3880.14 5748.2,3884.34 5767.8,3884.34 5772,3880.14 5772,3841.34 5772,3802.54 5776.2,3798.34 5795.8,3798.34 5800,3802.54 5800,3837.14 5804.2,3841.34 5845,3841.34 FPGA.115@6035,3841.34
A0: FPGA.107 SRAM.11 | length 861.8
  Bottom Layer w8: SRAM.11@5356.22,4029.49 5405.94,4029.49 5532.76,4156.3 5690,4156.3 5699.8,4156.3 5704,4160.5 5704,4188.41 5708.2,4192.61 5727.8,4192.61 5732,4188.41 5732,4156.3 5732,4124.19 5736.2,4119.99 5755.8,4119.99 5760,4124.19 5760,4152.1 5764.2,4156.3 5830,4156.3 FPGA.107@6035,4156.3
A1: FPGA.105 SRAM.10 | length 861.8
  Bottom Layer w8: SRAM.10@5356.22,4060.98 5404.17,4060.98 5578.23,4235.04 5840,4235.04 5849.8,4235.04 5854,4239.24 5854,4262.25 5858.2,4266.45 5877.8,4266.45 5882,4262.25 5882,4235.04 5882,4207.83 5886.2,4203.63 5905.8,4203.63 5910,4207.83 5910,4230.84 5914.2,4235.04 5975,4235.04 FPGA.105@6035,4235.04
A2: FPGA.103 SRAM.9 | length 861.8
  Bottom Layer w8: SRAM.9@5356.22,4092.48 5403.98,4092.48 5625.28,4313.78 5735,4313.78 5744.8,4313.78 5749,4317.98 5749,4336.1 5753.2,4340.3 5772.8,4340.3 5777,4336.1 5777,4313.78 5777,4291.46 5781.2,4287.26 5800.8,4287.26 5805,4291.46 5805,4309.58 5809.2,4313.78 5825,4313.78 FPGA.103@6035,4313.78
A3: FPGA.101 SRAM.8 | length 861.8
  Bottom Layer w8: SRAM.8@5356.22,4123.98 5405.16,4123.98 5673.7,4392.52 5870,4392.52 5893.8,4392.52 5898,4388.32 5898,4355.92 5902.2,4351.72 5921.8,4351.72 5926,4355.92 5926,4388.32 5930.2,4392.52 5940,4392.52 FPGA.101@6035,4392.52
A4: FPGA.99 SRAM.7 | length 861.8
  Bottom Layer w8: SRAM.7@5356.22,4155.47 5409.13,4155.47 5724.92,4471.26 5765,4471.26 5813.8,4471.26 5818,4467.06 5818,4444.45 5822.2,4440.25 5841.8,4440.25 5846,4444.45 5846,4467.06 5850.2,4471.26 5860,4471.26 FPGA.99@6035,4471.26
A5: FPGA.12 SRAM.48 | length 861.8
  Bottom Layer w8: FPGA.12@4223.98,4471.26 4370,4471.26 4428.8,4471.26 4433,4467.06 4433,4434.96 4437.2,4430.76 4456.8,4430.76 4461,4434.96 4461,4467.06 4465.2,4471.26 4475,4471.26 4523.74,4471.26 4839.53,4155.47 SRAM.48@4883.78,4155.47
A6: FPGA.14 SRAM.47 | length 861.8
  Bottom Layer w8: FPGA.14@4223.98,4392.52 4300,4392.52 4353.8,4392.52 4358,4388.32 4358,4346.43 4362.2,4342.23 4381.8,4342.23 4386,4346.43 4386,4388.32 4390.2,4392.52 4400,4392.52 4570.04,4392.52 4838.58,4123.98 SRAM.47@4883.78,4123.98
A7: FPGA.16 SRAM.46 | length 861.8
  Bottom Layer w8: FPGA.16@4223.98,4313.78 4405,4313.78 4453.8,4313.78 4458,4309.58 4458,4257.91 4462.2,4253.71 4481.8,4253.71 4486,4257.91 4486,4309.58 4490.2,4313.78 4500,4313.78 4616.26,4313.78 4837.56,4092.48 SRAM.46@4883.78,4092.48
A8: FPGA.18 SRAM.45 | length 861.8
  Bottom Layer w8: FPGA.18@4223.98,4235.04 4300,4235.04 4309.8,4235.04 4314,4239.24 4314,4267 4318.2,4271.2 4337.8,4271.2 4342,4267 4342,4235.04 4342,4203.08 4346.2,4198.88 4365.8,4198.88 4370,4203.08 4370,4230.84 4374.2,4235.04 4405,4235.04 4670,4235.04 4844.05,4060.98 SRAM.45@4883.78,4060.98
A9: FPGA.20 SRAM.44 | length 861.8
  Bottom Layer w8: FPGA.20@4223.98,4156.3 4405,4156.3 4414.8,4156.3 4419,4160.5 4419,4193.15 4423.2,4197.35 4442.8,4197.35 4447,4193.15 4447,4156.3 4447,4119.45 4451.2,4115.25 4470.8,4115.25 4475,4119.45 4475,4152.1 4479.2,4156.3 4575,4156.3 4713.74,4156.3 4840.55,4029.49 SRAM.44@4883.78,4029.49
A10: FPGA.28 SRAM.38 | length 862.1
  Bottom Layer w8: FPGA.28@4223.98,3841.34 4224.8,3840.51 4455,3840.51 4464.8,3840.51 4469,3844.71 4469,3891.32 4473.2,3895.52 4492.8,3895.52 4497,3891.32 4497,3840.51 4497,3791.36 4501.2,3787.16 4520.8,3787.16 4525,3791.36 4525,3836.31 4529.2,3840.51 4580,3840.51 SRAM.38@4883.78,3840.51
A11: FPGA.30 SRAM.37 | length 861.8
  Bottom Layer w8: FPGA.30@4223.98,3762.6 4315,3762.6 4324.8,3762.6 4329,3766.8 4329,3807.36 4333.2,3811.56 4352.8,3811.56 4357,3807.36 4357,3762.6 4357,3717.01 4361.2,3712.81 4380.8,3712.81 4385,3717.01 4385,3758.4 4389.2,3762.6 4410,3762.6 4786.07,3762.6 4832.49,3809.02 SRAM.37@4883.78,3809.02
A12: FPGA.32 SRAM.36 | length 861.8
  Bottom Layer w8: FPGA.32@4223.98,3683.86 4432,3683.86 4441.8,3683.86 4446,3688.06 4446,3724.14 4450.2,3728.34 4469.8,3728.34 4474,3724.14 4474,3683.86 4474,3643.58 4478.2,3639.38 4497.8,3639.38 4502,3643.58 4502,3679.66 4506.2,3683.86 4525,3683.86 4739.33,3683.86 4832.99,3777.52 SRAM.36@4883.78,3777.52
A13: FPGA.34 SRAM.35 | length 861.8
  Bottom Layer w8: FPGA.34@4223.98,3605.12 4318.2,3605.12 4328,3605.12 4332.2,3609.32 4332.2,3640.51 4336.4,3644.71 4356,3644.71 4360.2,3640.51 4360.2,3605.12 4360.2,3569.73 4364.4,3565.53 4384,3565.53 4388.2,3569.73 4388.2,3600.92 4392.4,3605.12 4415,3605.12 4689.09,3605.12 4829.99,3746.02 SRAM.35@4883.78,3746.02
A14: FPGA.36 SRAM.34 | length 861.8
  Bottom Layer w8: FPGA.36@4223.98,3526.38 4450,3526.38 4459.8,3526.38 4464,3530.58 4464,3556.88 4468.2,3561.08 4487.8,3561.08 4492,3556.88 4492,3526.38 4492,3495.88 4496.2,3491.68 4515.8,3491.68 4520,3495.88 4520,3522.18 4524.2,3526.38 4560,3526.38 4642.32,3526.38 4830.47,3714.53 SRAM.34@4883.78,3714.53
A15: FPGA.125 SRAM.21 | length 861.8
  Bottom Layer w8: SRAM.21@5356.22,3714.53 5409.13,3714.53 5676.02,3447.64 5765,3447.64 5774.8,3447.64 5779,3451.84 5779,3484.58 5783.2,3488.78 5802.8,3488.78 5807,3484.58 5807,3451.84 5811.2,3447.64 5885,3447.64 FPGA.125@6035,3447.64
A16: FPGA.123 SRAM.20 | length 861.8
  Bottom Layer w8: SRAM.20@5356.22,3746.02 5408.15,3746.02 5627.8,3526.38 5790,3526.38 5799.8,3526.38 5804,3530.58 5804,3548.87 5808.2,3553.07 5827.8,3553.07 5832,3548.87 5832,3526.38 5832,3503.89 5836.2,3499.69 5855.8,3499.69 5860,3503.89 5860,3522.18 5864.2,3526.38 5955,3526.38 FPGA.123@6035,3526.38
A17: FPGA.121 SRAM.19 | length 861.8
  Bottom Layer w8: SRAM.19@5356.22,3777.52 5406.46,3777.52 5578.86,3605.12 5700,3605.12 5709.8,3605.12 5714,3609.32 5714,3632.5 5718.2,3636.7 5737.8,3636.7 5742,3632.5 5742,3605.12 5742,3577.73 5746.2,3573.53 5765.8,3573.53 5770,3577.73 5770,3600.92 5774.2,3605.12 5820,3605.12 FPGA.121@6035,3605.12
A18: FPGA.119 SRAM.18 | length 861.8
  Bottom Layer w8: SRAM.18@5356.22,3809.02 5408.15,3809.02 5533.31,3683.86 5760,3683.86 5769.8,3683.86 5774,3688.06 5774,3716.14 5778.2,3720.34 5797.8,3720.34 5802,3716.14 5802,3683.86 5802,3651.58 5806.2,3647.38 5825.8,3647.38 5830,3651.58 5830,3679.66 5834.2,3683.86 5865,3683.86 FPGA.119@6035,3683.86
A19: FPGA.117 SRAM.17 | length 861.8
  Bottom Layer w8: SRAM.17@5356.22,3840.51 5409.17,3840.51 5487.08,3762.6 5635,3762.6 5644.8,3762.6 5649,3766.8 5649,3799.77 5653.2,3803.97 5672.8,3803.97 5677,3799.77 5677,3762.6 5677,3725.43 5681.2,3721.23 5700.8,3721.23 5705,3725.43 5705,3758.4 5709.2,3762.6 5755,3762.6 FPGA.117@6035,3762.6
BLUE0: FPGA.144 LCD_0.9 | length 2471.5
  Top Layer w8: LCD_0.9@4520,1320 4680,1480 4686.93,1486.93 4686.93,1492.87 4610.74,1569.06 4610.74,1575 4624.6,1588.86 4630.54,1588.86 4706.73,1512.67 4712.67,1512.67 4862.5,1662.5 5360,2160 5650,2160 6113.74,2623.74 FPGA.144@6113.74,2738.98
BLUE1: FPGA.142 LCD_0.10 | length 2471.5
  Top Layer w8: LCD_0.10@4620,1320 5040,1740 5046.93,1746.93 5046.93,1752.87 5028,1771.8 5028,1777.74 5041.86,1791.59 5047.8,1791.59 5069.7,1769.7 5091.59,1747.8 5097.53,1747.8 5111.39,1761.66 5111.39,1767.6 5089.5,1789.5 5067.6,1811.39 5067.6,1817.33 5081.46,1831.19 5087.4,1831.19 5106.33,1812.27 5112.27,1812.27 5187.5,1887.5 5443,2143 5657.04,2143 6160,2645.96 6160,2771.46 FPGA.142@6113.74,2817.72
BLUE2: FPGA.140 LCD_0.11 | length 2471.5
  Top Layer w8: LCD_0.11@4720,1320 4900,1500 4906.93,1506.93 4906.93,1512.87 4884.94,1534.86 4884.94,1540.8 4898.8,1554.65 4904.74,1554.65 4929.7,1529.7 4942.15,1517.24 4948.09,1517.24 4961.95,1531.1 4961.95,1537.04 4949.5,1549.5 4924.54,1574.45 4924.54,1580.39 4938.4,1594.25 4944.34,1594.25 4966.33,1572.27 4972.27,1572.27 5065,1665 5526,2126 5664.08,2126 6180,2641.92 6180,2830.2 FPGA.140@6113.74,2896.46
BLUE3: FPGA.138 LCD_0.12 | length 2472.9
  Top Layer w8: LCD_0.12@4820,1320 4820,1345 5072.5,1597.5 5167.53,1692.53 5167.53,1698.47 5151.74,1714.27 5151.74,1720.21 5165.6,1734.07 5171.54,1734.07 5190.3,1715.3 5227.15,1678.45 5233.09,1678.45 5246.95,1692.31 5246.95,1698.25 5213.07,1732.13 5213.07,1738.07 5220,1745 5584,2109 5671.12,2109 6200,2637.88 6200,2888.94 FPGA.138@6113.74,2975.2
BLUE4: FPGA.136 LCD_0.13 | length 2473.9
  Top Layer w8: LCD_0.13@4920,1320 4920,1333.83 5320.58,1734.42 5343.7,1757.53 5343.7,1763.47 5319.43,1787.74 5319.43,1793.68 5333.29,1807.54 5339.23,1807.54 5366.47,1780.3 5395.04,1751.73 5400.98,1751.73 5414.84,1765.59 5414.84,1771.53 5389.24,1797.13 5389.24,1803.07 5396.17,1810 6217,2630.83 6217,2950.68 FPGA.136@6113.74,3053.94
BLUE5: FPGA.134 LCD_0.14 | length 2471.5
  Top Layer w8: LCD_0.14@5020,1320 5475,1775 5516.39,1816.39 5516.39,1822.33 5497.65,1841.07 5497.65,1847.01 5511.51,1860.87 5517.45,1860.87 5539.16,1839.16 5553.95,1824.37 5559.89,1824.37 5573.75,1838.23 5573.75,1844.17 5561.93,1855.99 5561.93,1861.93 5568.86,1868.86 6235,2535 6235,3011.42 FPGA.134@6113.74,3132.68
BLUE6: FPGA.132 LCD_0.15 | length 2471.5
  Top Layer w8: LCD_0.15@5120,1320 5617.5,1817.5 5697.33,1897.33 5703.27,1897.33 5718.98,1881.62 5724.92,1881.62 5738.78,1895.48 5738.78,1901.42 5723.07,1917.13 5723.07,1923.07 5730,1930 6255,2455 6255,3070.16 FPGA.132@6113.74,3211.42
BLUE7: FPGA.130 LCD_0.16 | length 2471.5
  Top Layer w8: LCD_0.16@5220,1320 6272,2372 6272,3131.9 FPGA.130@6113.74,3290.16
CLK_pixel: FPGA.135 LCD_1.16 | length 2471.5
  Top Layer w8: LCD_1.16@5220,2220 5220,2340 5220,2439.8 5215.8,2444 5064.36,2444 5060.16,2448.2 5060.16,2467.8 5064.36,2472 5220,2472 5275.64,2472 5279.84,2476.2 5279.84,2495.8 5275.64,2500 5220,2500 5064.36,2500 5060.16,2504.2 5060.16,2523.8 5064.36,2528 5220,2528 5275.64,2528 5279.84,2532.2 5279.84,2551.8 5275.64,2556 5224.2,2556 5220,2560.2 5220,2570 5220,3000 5273.94,3053.94 FPGA.135@6035,3053.94
DAC_CS: U1.36 U2.1 | length 1438.5
  Top Layer w8: U1.36@7144.37,3840.2 7144.37,3907.37 7210,3973 7210,4406 7511,4707 7672,4707 U2.1@7855,4890
DAC_DIN: U1.38 U2.3 | length 2057.5
  Top Layer w8: U1.38@7105,3840.2 7105,3929 7173,3997 7173,4464.04 7450,4741.04 7450,4886 7584,5020 7880.43,5020 7931.53,4968.9 7931.53,4766.53 U2.3@7855,4690
DAC_SCK: U1.37 U2.2 | length 1756.7
  Top Layer w8: U1.37@7124.68,3840.2 7124.68,3918.68 7190,3984 7190,4457 7511,4778 7652,4778 7849,4975 7877.35,4975 7897.53,4954.82 7897.53,4832.53 U2.2@7855,4790
DE: FPGA.143 LCD_1.20 | length 2471.5
  Top Layer w8: LCD_1.20@5620,2220 5680,2220 5762.5,2302.5 5893.34,2433.34 5893.34,2439.28 5656.25,2676.37 5656.25,2682.3 5670.11,2696.16 5676.05,2696.16 5916.11,2456.11 5922.05,2456.11 5935.9,2469.97 5935.9,2475.9 5730.84,2680.97 5730.84,2686.91 5744.7,2700.77 5750.64,2700.77 5955.7,2495.7 5961.64,2495.7 5975.5,2509.56 5975.5,2515.5 5810.04,2680.97 5810.04,2686.91 5823.9,2700.77 5829.84,2700.77 5995.3,2535.3 6001.25,2535.29 6015.11,2549.15 6015.11,2555.09 6025,2565 6035,2575 FPGA.143@6035,2738.98
FPGA_1: "FPGA Breakout.1" FPGA.1 | length 373.5
  Top Layer w8: 3780,4845 3799.96,4864.96 FPGA.1@4145.24,4864.96
FPGA_2: "FPGA Breakout.2" FPGA.2 | length 706.1
  Top Layer w8: 3780,4745 3715,4810 3715,4880 3750,4915 4173.94,4915 FPGA.2@4223.98,4864.96
FPGA_3: "FPGA Breakout.3" FPGA.3 | length 423.7
  Top Layer w8: 3780,4645 3921.22,4786.22 FPGA.3@4145.24,4786.22
FPGA_5: "FPGA Breakout.4" FPGA.5 | length 432.5
  Top Layer w8: 3780,4545 3942.48,4707.48 FPGA.5@4145.24,4707.48
FPGA_7: "FPGA Breakout.5" FPGA.7 | length 441.3
  Top Layer w8: 3780,4445 3963.74,4628.74 FPGA.7@4145.24,4628.74
FPGA_9: "FPGA Breakout.6" FPGA.9 | length 450.1
  Top Layer w8: 3780,4345 3985,4550 FPGA.9@4145.24,4550
FPGA_11: "FPGA Breakout.7" FPGA.11 | length 459
  Top Layer w8: 3780,4245 4006.26,4471.26 FPGA.11@4145.24,4471.26
FPGA_13: "FPGA Breakout.8" FPGA.13 | length 467.8
  Top Layer w8: 3780,4145 4027.52,4392.52 FPGA.13@4145.24,4392.52
FPGA_15: "FPGA Breakout.9" FPGA.15 | length 476.6
  Top Layer w8: 3780,4045 4048.78,4313.78 FPGA.15@4145.24,4313.78
FPGA_17: "FPGA Breakout.10" FPGA.17 | length 485.4
  Top Layer w8: 3780,3945 4070.04,4235.04 FPGA.17@4145.24,4235.04
FPGA_19: "FPGA Breakout.11" FPGA.19 | length 494.2
  Top Layer w8: 3780,3845 4091.3,4156.3 FPGA.19@4145.24,4156.3
FPGA_21: "FPGA Breakout.12" FPGA.21 | length 503
  Top Layer w8: 3780,3745 3812.68,3745 FPGA.21@4145.24,4077.56
FPGA_MISO: FPGA.122 U1.79 | length 1270.5
  Top Layer w8: v1(6550,3026.88) 6781.43,3026.88 6927.05,3172.51 6927.05,3239.02 U1.79@6927.83,3239.8
  Bottom Layer w8: FPGA.122@6113.74,3605.12 6124.88,3605.12 6190,3540 6190,3386.88 v1(6550,3026.88)
FPGA_MOSI: FPGA.120 U1.78 | length 1268.5
  Top Layer w8: v1(6590,3081.88) 6812.38,3081.88 6907.37,3176.86 6907.37,3239.02 U1.78@6908.15,3239.8
  Bottom Layer w8: FPGA.120@6113.74,3683.86 6235,3562.6 6235,3436.88 6293.44,3378.44 6300.37,3371.51 6306.31,3371.51 6321.28,3386.48 6327.22,3386.48 6341.08,3372.62 6341.08,3366.68 6326.11,3351.71 6326.11,3345.77 6408.44,3263.44 v1(6590,3081.88)
FPGA_SCLK: FPGA.118 U1.77 | length 1268.2
  Top Layer w8: v1(6630,3136.88) 6843.34,3136.88 6888.46,3182 U1.77@6888.46,3239.8
  Bottom Layer w8: FPGA.118@6113.74,3762.6 6280,3596.34 6280,3486.88 6300.62,3466.25 6307.55,3459.32 6313.49,3459.32 6344.16,3489.99 6350.1,3489.99 6363.96,3476.13 6363.96,3470.19 6333.29,3439.53 6333.29,3433.59 6413.44,3353.44 v1(6630,3136.88)